# Allegro board ti_foc_motor.brd
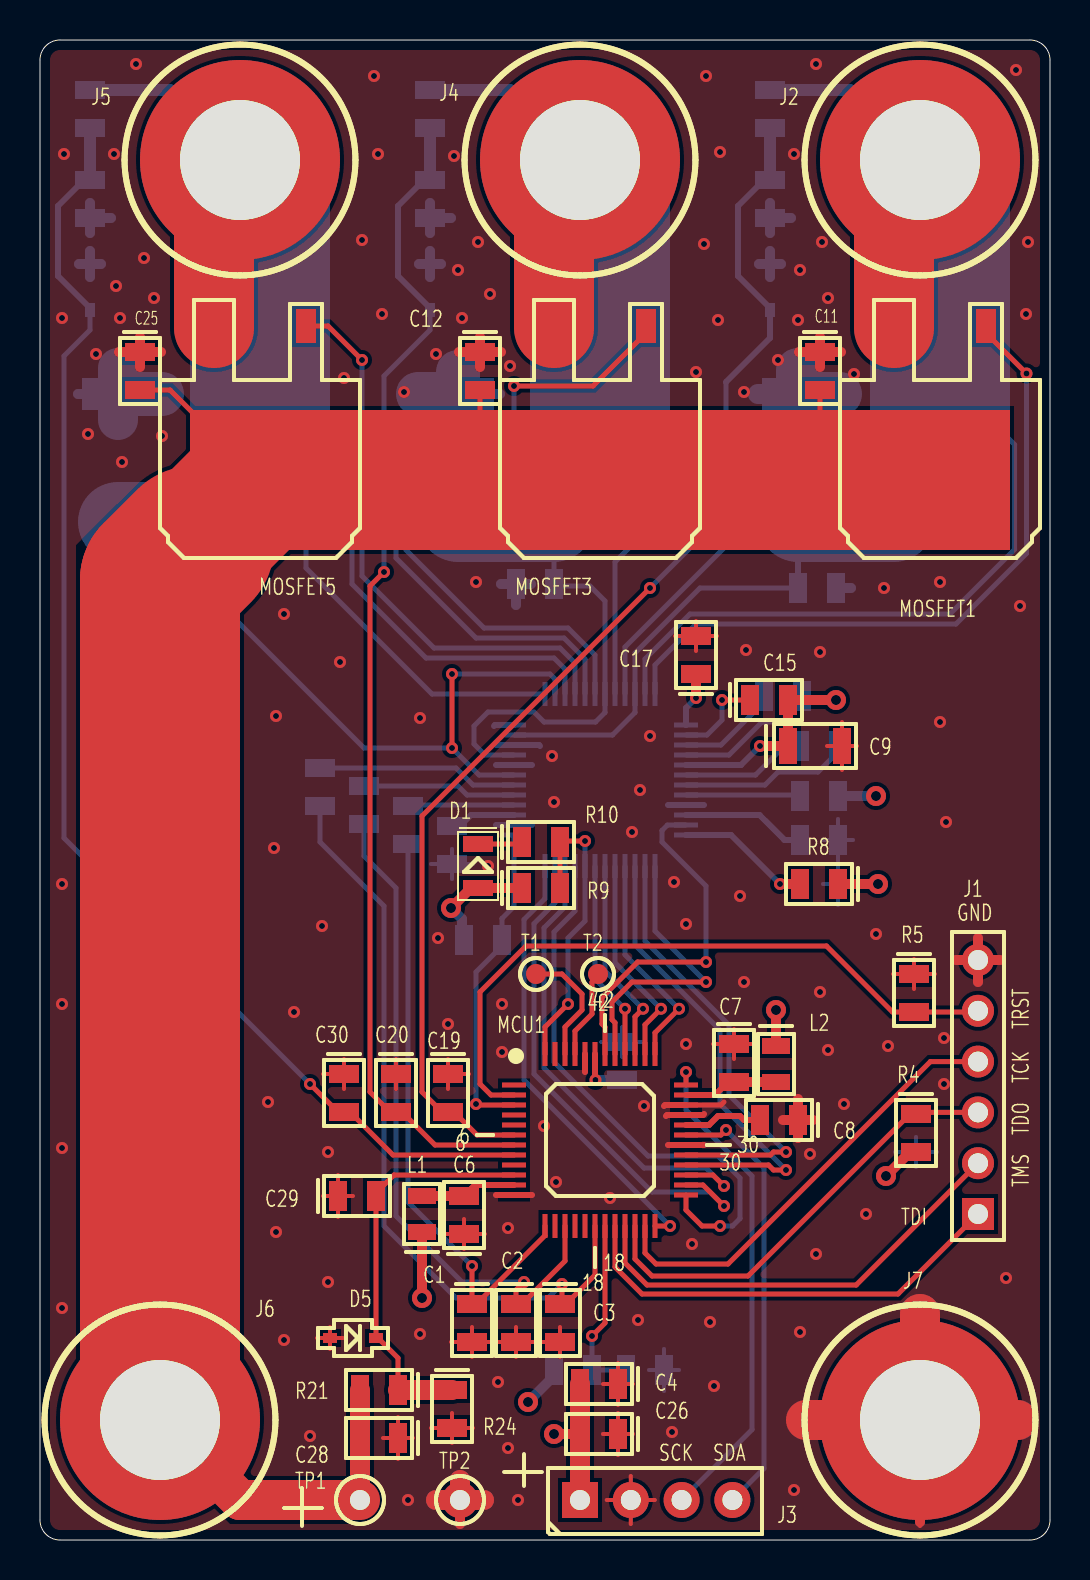
[diagram p0: board, top side]
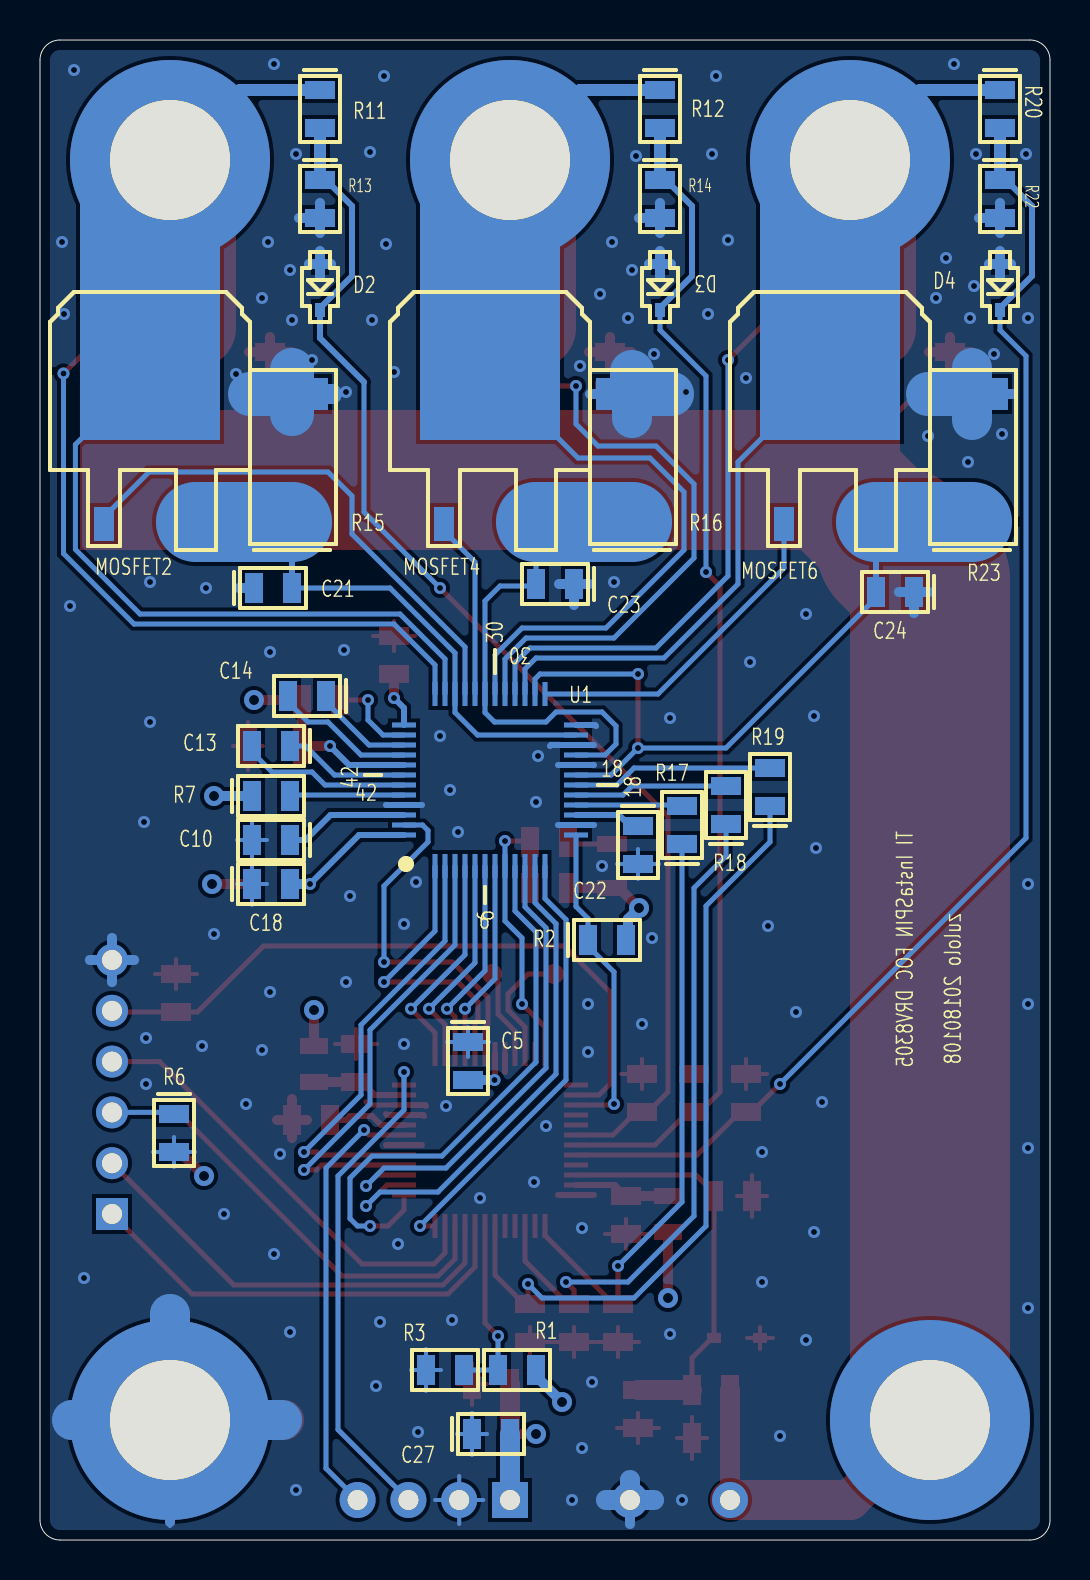
[diagram p1: board, bottom side, seen from below]

Outline 50.5 x 75 mm; copper layers: TOP, POWER, GND, BOTTOM. Coordinates in mm from the lower left corner of the outline.
Outline path: 0,74 0,1 arc(0.29,0.29) 1,0 49.5,0 arc(50.21,0.29) 50.5,1 50.5,74 arc(50.21,74.71) 49.5,75 1,75 arc(0.29,74.71) 0,74

## Placement (name value [footprint] x y rotation side)
C1  2.2nF  [SMD_C_0805]  21.6 11.8 0 top
C2  2.2nF  [SMD_C_0805]  23.8 11.8 0 top
C3  2.2nF  [SMD_C_0805]  26 11.8 0 top
C4  2.2uF  [SMD_C_0805]  28.9 7.8 270 top
C5  2.2uF  [SMD_C_0805]  29.1 24.9 180 bottom
C6  2.2uF  [SMD_C_0805]  21.2 15.3 180 top
C7  2.2uF  [SMD_C_0805]  34.7 24.8 0 top
C8  2.2uF  [SMD_C_0805]  37.9 21 270 top
C9  4.7uF  [SMD_C_1206]  37.4 39.7 90 top
C10  1uF  [SMD_C_0805]  38 35 270 bottom
C11  1uF  [SMD_C_0805]  39 59.4 0 top
C12  1uF  [SMD_C_0805]  22 59.4 0 top
C13  47nF  [SMD_C_0805]  38 39.7 270 bottom
C14  47nF  [SMD_C_0805]  36.2 42.2 270 bottom
C15  2.2uF  [SMD_C_0805]  35.5 42 90 top
C17  1uF  [SMD_C_0805]  32.8 43.3 180 top
C18  1uF  [SMD_C_0805]  39.9 32.8 90 bottom
C19  0.1uF  [SMD_C_0805]  20.4 23.3 0 top
C20  0.1uF  [SMD_C_0805]  17.8 23.3 0 top
C21  1nF  [SMD_C_0805]  39.8 47.6 90 bottom
C22  1uF  [SMD_C_0805]  20.6 35.7 180 bottom
C23  1nF  [SMD_C_0805]  23.8 47.8 270 bottom
C24  1nF  [SMD_C_0805]  6.8 47.4 270 bottom
C25  1uF  [SMD_C_0805]  5 59.4 0 top
C26  10uF  [SMD_C_0805]  28.9 5.3 270 top
C27  10uF  [SMD_C_0805]  28.9 5.3 90 bottom
C28  0.1uF  [SMD_C_0805]  17.9 5.1 270 top
C29  0.1uF  [SMD_C_0805]  14.9 17.2 90 top
C30  0.1uF  [SMD_C_0805]  15.2 23.3 0 top
D1  RED  [SMD_D_0805]  21.9 34.7 0 top
D2  3.3V  [SOD323]  36.5 61.5 0 bottom
D3  3.3V  [SOD323]  19.5 61.5 0 bottom
D4  3.3V  [SOD323]  2.5 61.5 0 bottom
D5  3.3V  [SOD323]  16.8 10.1 270 top
J1  JTAG  [CONNECTER1X6]  46.9 16.3 180 top
J2  motor_A  [BANANA]  44 69 0 top
J3  Conn1X4  [CONN1X4]  27 2 90 top
J4  motor_B  [BANANA]  27 69 0 top
J5  motor_C  [BANANA]  10 69 0 top
J6  power_P  [BANANA]  6 6 0 top
J7  power_GND  [BANANA]  44 6 0 top
L1  bead  [SMD_L_0805]  19.1 15.4 180 top
L2  bead  [SMD_L_0805]  36.8 24.7 0 top
MCU1  TMS320F28027  [LQFP48_MCU]  28 20 0 top
MOSFET1  IRLR7843-TO252AA  [TO252AA_ZK]  45 53 180 top
MOSFET2  IRLR7843-TO252AA  [TO252AA_ZK]  45 58.5 180 bottom
MOSFET3  IRLR7843-TO252AA  [TO252AA_ZK]  28 53 180 top
MOSFET4  IRLR7843-TO252AA  [TO252AA_ZK]  28 58.5 180 bottom
MOSFET5  IRLR7843-TO252AA  [TO252AA_ZK]  11 53 180 top
MOSFET6  IRLR7843-TO252AA  [TO252AA_ZK]  11 58.5 180 bottom
R1  820R  [SMD_R_0805]  27.6 8.5 90 bottom
R2  2.2K  [SMD_R_0805]  23.1 30 90 bottom
R3  2.2K  [SMD_R_0805]  29.3 8.5 270 bottom
R4  820R  [SMD_R_0805]  43.8 21.3 0 top
R5  2.2K  [SMD_R_0805]  43.7 28.3 0 top
R6  2.2K  [SMD_R_0805]  43.8 21.3 180 bottom
R7  100R  [SMD_R_0805]  39.9 37.2 90 bottom
R8  0R  [SMD_R_0805]  39.9 32.8 270 top
R9  10K  [SMD_R_0805]  24.1 32.6 90 top
R10  330R  [SMD_R_0805]  24.1 34.9 90 top
R11  62K  [SMD_R_0805]  36.5 72.5 180 bottom
R12  62K  [SMD_R_0805]  19.5 72.5 180 bottom
R13  5K  [SMD_R_0805]  36.5 68 180 bottom
R14  5K  [SMD_R_0805]  19.5 68 180 bottom
R15  0.007R  [SMD_R_2512]  37.9 50.9 0 bottom
R16  0.007R  [SMD_R_2512]  20.9 50.9 0 bottom
R17  56R  [SMD_R_0805]  18.4 34.8 0 bottom
R18  56R  [SMD_R_0805]  16.2 35.8 0 bottom
R19  56R  [SMD_R_0805]  14 36.7 0 bottom
R20  62K  [SMD_R_0805]  2.5 72.5 180 bottom
R21  62K  [SMD_R_0805]  17.9 7.5 270 top
R22  5K  [SMD_R_0805]  2.5 68 180 bottom
R23  0.007R  [SMD_R_2512]  3.9 50.9 0 bottom
R24  5K  [SMD_R_0805]  20.6 7.5 0 top
T1  X2  [TESTPAD_SMD_D10]  24.8 28.3 0 top
T2  X1  [TESTPAD_SMD_D10]  27.9 28.3 0 top
TP1  CAP_P  [TESTPAD_CIR_10]  16 2 0 top
TP2  CAP_N  [TESTPAD_CIR_10]  21 2 0 top
U1  DRV8305N  [HTQFP48]  28 38 90 bottom

## Library data of the parts
C1-C15 C17-C30 = CAP NP
D1 = LED
D2-D5 = DIODE TVS
J1 = C1X6Gen
J2 J4-J7 = Banana
J3 = C1X4Gen
L1 L2 = INDUCTOR
MCU1 = TMS320F28027PT
MOSFET1-MOSFET6 = N_MOSFET_TO252-263
R1-R24 = RESISTOR
T1 T2 = TestPad_Small_SMD
TP1 TP2 = TestPad
U1 = DRV8305_0

## Footprints (pads in the part's own frame, mm; a bottom-side part is the same pattern mirrored in y, then rotated)
BANANA
  round 10 hole 6: 1(0,0)
CONN1X4
  rect 1.8x1.8 hole 1: 1(0,0)
  round 1.8 hole 1: 2(0,-2.54) 3(0,-5.08) 4(0,-7.62)
CONNECTER1X6
  rect 1.6x1.6 hole 1: 1(0,0)
  round 1.6 hole 1: 2(0,-2.54) 3(0,-5.08) 4(0,-7.62) 5(0,-10.16) 6(0,-12.7)
HTQFP48
  rect 1.2x0.25 smd: 1(-4.3,2.75) 2(-4.3,2.25) 3(-4.3,1.75) 4(-4.3,1.25) 5(-4.3,0.75) 6(-4.3,0.25) 7(-4.3,-0.25) 8(-4.3,-0.75) 9(-4.3,-1.25) 10(-4.3,-1.75) 11(-4.3,-2.25) 12(-4.3,-2.75) 25(4.3,-2.75) 26(4.3,-2.25) 27(4.3,-1.75) 28(4.3,-1.25) 29(4.3,-0.75) 30(4.3,-0.25) 31(4.3,0.25) 32(4.3,0.75) 33(4.3,1.25) 34(4.3,1.75) 35(4.3,2.25) 36(4.3,2.75)
  rect 0.25x1.2 smd: 13(-2.75,-4.3) 14(-2.25,-4.3) 15(-1.75,-4.3) 16(-1.25,-4.3) 17(-0.75,-4.3) 18(-0.25,-4.3) 19(0.25,-4.3) 20(0.75,-4.3) 21(1.25,-4.3) 22(1.75,-4.3) 23(2.25,-4.3) 24(2.75,-4.3) 37(2.75,4.3) 38(2.25,4.3) 39(1.75,4.3) 40(1.25,4.3) 41(0.75,4.3) 42(0.25,4.3) 43(-0.25,4.3) 44(-0.75,4.3) 45(-1.25,4.3) 46(-1.75,4.3) 47(-2.25,4.3) 48(-2.75,4.3)
LQFP48_MCU
  rect 1.2x0.25 smd: 1(-4.3,2.75) 2(-4.3,2.25) 3(-4.3,1.75) 4(-4.3,1.25) 5(-4.3,0.75) 6(-4.3,0.25) 7(-4.3,-0.25) 8(-4.3,-0.75) 9(-4.3,-1.25) 10(-4.3,-1.75) 11(-4.3,-2.25) 12(-4.3,-2.75) 25(4.3,-2.75) 26(4.3,-2.25) 27(4.3,-1.75) 28(4.3,-1.25) 29(4.3,-0.75) 30(4.3,-0.25) 31(4.3,0.25) 32(4.3,0.75) 33(4.3,1.25) 34(4.3,1.75) 35(4.3,2.25) 36(4.3,2.75)
  rect 0.25x1.2 smd: 13(-2.75,-4.3) 14(-2.25,-4.3) 15(-1.75,-4.3) 16(-1.25,-4.3) 17(-0.75,-4.3) 18(-0.25,-4.3) 19(0.25,-4.3) 20(0.75,-4.3) 21(1.25,-4.3) 22(1.75,-4.3) 23(2.25,-4.3) 24(2.75,-4.3) 37(2.75,4.3) 38(2.25,4.3) 39(1.75,4.3) 40(1.25,4.3) 41(0.75,4.3) 42(0.25,4.3) 43(-0.25,4.3) 44(-0.75,4.3) 45(-1.25,4.3) 46(-1.75,4.3) 47(-2.25,4.3) 48(-2.75,4.3)
SMD_C_0805
  rect 1.5x0.9 smd: 1(0,0) 2(0,-1.9)
SMD_C_1206
  rect 1.8x0.9 smd: 1(0,0) 2(0,-2.7)
SMD_D_0805
  rect 1.5x0.8 smd: 1(0,0.1) 2(0,-2.1)
SMD_L_0805
  rect 1.4x0.8 smd: 1(0,0) 2(0,-1.8)
SMD_R_0805
  rect 1.5x0.9 smd: 1(0,0) 2(0,-1.9)
SMD_R_2512
  rect 3.6x1.6 smd: 1(0,0) 2(0,-6.4)
SOD323
  rect 0.5x0.7 smd: 1(0,0) 2(0,-2.3)
TESTPAD_CIR_10
  round 1.8 hole 1: 1(0,0)
TESTPAD_SMD_D10
  round 1 smd: 1(0,0)
TO252AA_ZK
  rect 1x1.7 smd: 1(-2.3,-7.7)
  rect 1.5x2.2 smd: 3(2.3,-7.6)
  rect 7x7 smd: 4(0,0)

## Nets
3.3V: C4.2 C26.2 C27.2 D1.2(ANODE) J3.1 L1.1 L2.1 R1.2 R2.2 R4.2 R8.1 R9.1
GND: C1.2 C2.2 C3.2 C4.1 C5.1 C6.1 C7.1 C8.1 C9.2 C10.2 C11.1 C12.1 C17.2 C18.1 C19.1 C20.1 C21.1 C22.2 C23.1 C24.1 C25.1 C26.1 C27.1 C28.1 C29.1 C30.1 D2.2(ANODE) D3.2(ANODE) D4.2(ANODE) D5.2(ANODE) J1.6 J3.2 J7.1 MCU1.12(VSSA/VREFLO) MCU1.30(TEST) MCU1.33(VSS#33) MCU1.34(V\R\E\G\E\N\Z\) MCU1.44(VSS#44) R3.2 R5.1 R6.2 R13.2 R14.2 R15.2 R16.2 R22.2 R23.2 R24.2 TP2.1(T) U1.14(GND#14) U1.20(SP3) U1.22(SP2) U1.24(SP1) U1.45(GND#45)
PVDD: C9.1 C11.2 C12.2 C15.2 C25.2 C28.2 J6.1 MOSFET1.4(D) MOSFET3.4(D) MOSFET5.4(D) R7.1 R21.2 TP1.1(T) U1.41(PVDD)
GH_A: MOSFET1.1(G) U1.36(GHA)
GH_B: MOSFET3.1(G) U1.29(GHB)
GH_C: MOSFET5.1(G) U1.28(GHC)
GL_A: MOSFET2.1(G) U1.33(GLA)
GL_B: MOSFET4.1(G) U1.32(GLB)
GL_C: MOSFET6.1(G) U1.25(GLC)
GPIO34: MCU1.19(GPIO34/COMP2OUT) R1.1 R3.1
MCU_EN_GATE: MCU1.41(GPIO6/EPWM4A/EPWMSYNCI/EPWMSYNC) U1.1(EN_GATE)
MCU_IIC_SCK: J3.3 MCU1.36(GPIO33/SCLA/EPWMSYNCO/A\D\C\S\O)
MCU_IIC_SDA: J3.4 MCU1.31(GPIO32/SDAA/EPWMSYNCI/A\D\C\S\O)
MCU_INH_A: MCU1.29(GPIO0/EPWM1A) U1.2(INHA)
MCU_INH_B: MCU1.37(GPIO2/EPWM2A) U1.4(INHB)
MCU_INH_C: MCU1.39(GPIO4/EPWM3A) U1.6(INHC)
MCU_INL_A: MCU1.28(GPIO1/EPWM1B/COMP1OUT) U1.3(INLA)
MCU_INL_B: MCU1.38(GPIO3/EPWM2B/COMP2OUT) U1.5(INLB)
MCU_INL_C: MCU1.40(GPIO5/EPWM3B/ECAP1) U1.7(INLC)
MCU_ISEN_A: C1.1 MCU1.13(ADCINB1) R17.1
MCU_ISEN_B: C2.1 MCU1.15(ADCINB3) R18.1
MCU_ISEN_C: C3.1 MCU1.18(ADCINB7) R19.1
MCU_NFAULT: MCU1.48(GPIO28/SCIRXDA/SDAA/T\Z\2\) R9.2 R10.2 U1.8(NFAULT)
MCU_PWRGD: MCU1.3(X\R\S\) R2.1 U1.13(PWRGD)
MCU_SPI_CS: MCU1.25(GPIO19/XCLKIN/S\P\I\S\T\E\A\/SC) U1.9(NSCS)
MCU_SPI_MISO: MCU1.26(GPIO17/SPISOMIA/T\Z\3\) U1.11(SDO)
MCU_SPI_MOSI: MCU1.27(GPIO16/SPISIMOA/T\Z\2\) U1.10(SDI)
MCU_SPI_SCK: MCU1.24(GPIO18/SPICLKA/SCITXDA/XCLKOUT) U1.12(SCLK)
MCU_VSEN_A: C19.2 D2.1(CATHODE) MCU1.6(ADCINA7) R11.2 R13.1
MCU_VSEN_B: C20.2 D3.1(CATHODE) MCU1.7(ADCINA3) R12.2 R14.1
MCU_VSEN_C: C30.2 D4.1(CATHODE) MCU1.8(ADCINA1) R20.2 R22.1
MCU_VSEN_PVDD: C29.2 D5.1(CATHODE) MCU1.10(ADCINA0/VREFHI) R21.1 R24.1
MCU_WAKE: MCU1.42(GPIO7/EPWM4B/SCIRXDA) U1.47(WAKE)
SH_A: J2.1 MOSFET1.3(S) MOSFET2.4(D) R11.1 U1.35(SHA)
SH_B: J4.1 MOSFET3.3(S) MOSFET4.4(D) R12.1 U1.30(SHB)
SH_C: J5.1 MOSFET5.3(S) MOSFET6.4(D) R20.1 U1.27(SHC)
SL_A: C21.2 MOSFET2.3(S) R15.1 U1.23(SN1) U1.34(SLA)
SL_B: C23.2 MOSFET4.3(S) R16.1 U1.21(SN2) U1.31(SLB)
SL_C: C24.2 MOSFET6.3(S) R23.1 U1.19(SN3) U1.26(SLC)
TCK: J1.4 MCU1.23(GPIO38/XCLKIN(TCK))
TDI: J1.1 MCU1.20(GPIO35(TDI))
TDO: J1.3 MCU1.22(GPIO37(TDO)) R4.1 R6.1
TMS: J1.2 MCU1.21(GPIO36(TMS))
TRST: J1.5 MCU1.2(T\R\S\T\) R5.2
N01800: D1.1(CATHODE) R10.1
N02208: C22.1 U1.15(AVDD)
N02325: R17.2 U1.16(SO1)
N02329: R18.2 U1.17(SO2)
N02333: R19.2 U1.18(SO3)
N03801: C17.1 U1.37(VCP_LSD)
N03912: C15.1 U1.38(VCPH)
N04769: C13.1 U1.42(CP1L)
N04773: C13.2 U1.43(CP1H)
N04796: C14.1 U1.39(CP2H)
N04800: C14.2 U1.40(CP2L)
N04838: R7.2 U1.44(VDRAIN)
N04994: C10.1 U1.46(DVDD)
N05122: C18.2 R8.2 U1.48(VREF)
N3758007: C6.2 L1.2 MCU1.11(VDDA)
N3759669: C7.2 L2.2 MCU1.35(VDDIO)
N3759821: C5.2 MCU1.43(VDD#43)
N3759959: C8.2 MCU1.32(VDD#32)
N3770874: MCU1.46(X2) T1.1
N3770878: MCU1.45(X1) T2.1

Pads without a net: MCU1 1 4 5 9 14 16 17 47

## Via types
v1: diameter 0.6, hole 0.3, TOP to BOTTOM, 144 vias
v2: diameter 1, hole 0.5, TOP to BOTTOM, 9 vias

## Routing (per net, layer and track width the routed paths; a pad name or vN(x,y) marks a point on that pad's centre or on a via; arc(x,y) is an arc through that point)
3.3V: length 31.1
  TOP w0.5: L1.1 v2(19.1,12.1) ; L2.1 v2(36.8,26.5) ; v2(20.55,31.6) 21.55,32.6 D1.2 R9.1 ; C26.2 v2(25.7,5.3) ; R4.2 43.5,19.4 v2(42.3,18.2) ; R8.1 v2(41.9,32.8)
  TOP w1: J3.1 C26.2 C4.2
  POWER w0.2: 26.8,2 J3.1
  POWER w0.5: 27,3.2 J3.1 27,0.8 ; 25.8,2 26.8,2
  BOTTOM w0.5: R1.2 25.7,8.2 v2(24.4,6.9) ; 20.5,31.6 v2(20.55,31.6) 21.1,31.05 21.1,30.1 R2.2
  BOTTOM w1: J3.1 C26.2
GND: length 260
  TOP w0.2: C9.2 40.1,40.9 ; C9.2 40.1,38.5 ; C9.2 39.35,39.7 ; C9.2 40.85,39.7 ; C17.2 32.8,45.95 ; C17.2 32.8,44.45 ; C17.2 33.85,45.2 ; C17.2 31.75,45.2 ; J3.2 29.54,3.2 ; J3.2 30.74,2 ; J3.2 28.34,2 ; J3.2 29.54,0.8 ; 15.2,22.55 C30.1 ; C30.1 15.2,24.05 ; C30.1 14.15,23.3 ; R24.2 21.65,5.6 ; R24.2 20.6,4.85 ; R24.2 19.55,5.6 ; R24.2 20.6,6.35 ; 20.15,15.3 C6.1 ; C6.1 21.2,14.55 ; C6.1 21.2,16.05 ; C6.1 22.25,15.3 ; 43.7,27.55 R5.1 ; R5.1 43.7,29.05 ; R5.1 42.65,28.3 ; R5.1 44.75,28.3 ; 17.15,5.1 C28.1 ; C28.1 18.65,5.1 ; C28.1 17.9,6.15 ; C28.1 17.9,4.05 ; 20.55,9.9 C1.2 ; C1.2 21.6,10.65 ; C1.2 22.65,9.9 ; C1.2 21.6,9.15 ; C2.2 23.8,10.65 ; C2.2 23.8,9.15 ; C2.2 22.75,9.9 ; C2.2 24.85,9.9 ; 44,0.7 44,0.9 ; 17.8,22.55 C20.1 17.8,24.05 ; 26,9.15 C3.2 ; C3.2 26,10.65 ; C3.2 24.95,9.9 ; 28.9,4.25 C26.1 ; C26.1 29.65,5.3 ; C26.1 28.15,5.3 ; C26.1 28.9,6.35 ; 14.5,9.55 D5.2 ; D5.2 14.5,10.65 ; D5.2 15.15,10.1 ; D5.2 13.85,10.1 ; 34.7,24.05 C7.1 ; C7.1 34.7,25.55 ; C7.1 33.65,24.8 ; C7.1 35.75,24.8 ; 14.9,16.15 C29.1 ; C29.1 15.65,17.2 ; C29.1 14.9,18.25 ; C29.1 14.15,17.2 ; 49.3,6 48.87,6 ; C19.1 20.4,24.05 ; C19.1 20.4,22.55 ; C19.1 21.45,23.3 ; 28.15,7.8 C4.1 ; C4.1 28.9,6.75 ; C4.1 28.9,8.85 ; C4.1 29.65,7.8 ; 37.9,19.95 37.9,20.1 ; 21,3.2 21,3
  TOP w0.25: MCU1.34 34.05,21.75 34.2,21.9
  TOP w0.3: 31.2,21.7 31.25,21.75 MCU1.34 ; 24.6,17.25 MCU1.12 22.8,17.25 ; MCU1.44 27.25,23.4 ; 31.4,19.75 MCU1.30 33.2,19.75 ; 31.3,21.2 31.35,21.25 MCU1.33 33.15,21.25 33.2,21.3
  TOP w0.5: C12.1 22,58.65 ; C12.1 23.05,59.4 ; C12.1 22,60.15 ; C12.1 20.95,59.4 ; J1.6 46.9,30.1 ; J1.6 46.9,27.9 ; J1.6 48,29 ; J1.6 45.8,29 ; C25.1 6.05,59.4 ; C25.1 5,60.15 ; C25.1 3.95,59.4 ; C25.1 5,58.65 ; 37.9,20.1 C8.1 ; C8.1 37.15,21 ; C8.1 38.65,21 ; C8.1 37.9,22.05 ; C11.1 39,60.15 ; C11.1 37.95,59.4 ; C11.1 39,58.65 ; C11.1 40.05,59.4 ; TP2.1 21,0.8 ; 44,0.9 J7.1
  TOP w1: 21,3 TP2.1 ; TP2.1 22.2,2 ; TP2.1 19.8,2
  TOP w2: J7.1 44,11.3 ; J7.1 38.3,6 ; J7.1 48.87,6
  GND w0.2: 49.1,6 49.3,6 ; 44,0.8 44,0.7 ; 46.9,28 46.9,27.9 ; 21,3.1 21,3.2 ; 47.9,29 48,29 ; 19.9,2 19.8,2 ; 21,0.9 21,0.8 ; 30.6,2 30.74,2 ; 44,11.1 44,11.3 ; 45.9,29 45.8,29 ; 29.54,0.9 29.54,0.8 ; 28.34,2 28.35,2
  GND w0.5: J3.2 29.54,3.2 ; J3.2 29.54,0.9 ; J3.2 28.35,2 ; J3.2 30.6,2 ; J1.6 46.9,30.1 ; J1.6 45.9,29 ; J1.6 47.9,29 ; J1.6 46.9,28 ; TP2.1 21,0.9 ; J7.1 44,0.8
  GND w1: TP2.1 22.2,2 ; TP2.1 19.9,2 ; TP2.1 21,3.1
  GND w1.5: J7.1 49.1,6
  GND w2: 38.5,6 J7.1 44,11.1
  BOTTOM w0.2: 28.34,2 J3.2 ; J3.2 29.54,3.2 ; J3.2 29.54,0.8 ; J3.2 30.74,2 ; 28.9,4.25 C26.1 ; C26.1 29.65,5.3 ; C26.1 28.9,6.35 ; C26.1 28.15,5.3 ; 21,3.2 21,3 ; 30.45,8.5 R3.2 ; R3.2 31.2,7.45 ; R3.2 31.2,9.55 ; R3.2 31.95,8.5 ; 35.8,57.3 35.9,57.3 ; C5.1 30.15,24.9 ; C5.1 29.1,24.15 ; C5.1 28.05,24.9 ; C5.1 29.1,25.65 ; 18.8,57.3 18.9,57.3 ; 39.15,35 C10.2 ; C10.2 39.9,36.05 ; C10.2 39.9,33.95 ; C10.2 40.65,35 ; C18.1 39.9,33.85 ; C18.1 40.65,32.8 ; C18.1 39.9,31.75 ; C18.1 39.15,32.8 ; 43.8,18.65 R6.2 ; R6.2 43.8,20.15 ; R6.2 44.85,19.4 ; R6.2 42.75,19.4 ; 20.6,33.05 C22.2 ; C22.2 20.6,34.55 ; C22.2 19.55,33.8 ; C22.2 21.65,33.8 ; 37.9,56.2 37.9,56.3 ; 1.8,57.3 1.9,57.3 ; 49.3,6 48.9,6 ; 44,0.7 44,0.9
  BOTTOM w0.3: 22.7,40.7 22.75,40.75 U1.24 ; 33.2,36.75 U1.45 31.4,36.75 ; 22.8,38.75 U1.20 24.6,38.75 ; 22.8,39.75 U1.22 24.95,39.75 25,39.7 ; 22.8,35.75 U1.14 24.6,35.75
  BOTTOM w0.5: D2.2 37.05,63.8 ; D2.2 36.5,64.45 ; D2.2 36.5,63.15 ; D2.2 35.95,63.8 ; C23.1 23.05,47.8 ; C23.1 24.55,47.8 ; C23.1 23.8,46.75 ; J1.6 46.9,30.1 ; J1.6 48,29 ; J1.6 46.9,27.9 ; J1.6 45.8,29 ; D4.2 1.95,63.8 ; D4.2 2.5,64.45 ; D4.2 2.5,63.15 ; D4.2 3.05,63.8 ; R22.2 2.5,66.85 ; R22.2 2.5,65.35 ; R22.2 3.55,66.1 ; D3.2 18.95,63.8 ; D3.2 20.05,63.8 ; D3.2 19.5,63.15 ; D3.2 19.5,64.45 ; R13.2 36.5,65.35 ; R13.2 36.5,66.85 ; R13.2 37.55,66.1 ; R14.2 20.55,66.1 ; R14.2 19.5,65.35 ; R14.2 19.5,66.85 ; C21.1 40.55,47.6 ; C24.1 6.05,47.4 ; C24.1 6.8,46.35 ; C24.1 7.55,47.4 ; 44,0.9 J7.1 ; 1.9,57.3 R23.2 ; R16.2 23,57.3 ; TP2.1 21,0.8
  BOTTOM w1: TP2.1 19.8,2 ; TP2.1 22.2,2 ; TP2.1 21,3 ; 35.9,57.3 R15.2
  BOTTOM w2: 3.9,58.6 R23.2 3.9,56 ; 38.4,6 J7.1 ; J7.1 44,11.3 ; J7.1 48.9,6 ; R16.2 20.9,56.1
  BOTTOM w2.2: R23.2 6.1,57.3 ; 37.9,56.3 R15.2 ; R15.2 37.9,58.5 ; R15.2 40,57.3 ; 20.9,58.4 R16.2 18.9,57.3
  vias: v1(1.1,61.1) v1(1.1,32.8) v1(1.1,26.8) v1(1.1,19.6) v1(1.1,11.6) v1(1.2,69.3) v1(2.4,55.3) v1(2.8,59.3) v1(3.7,69.3) v1(3.8,62.7) v1(4,61.1) v1(4.1,53.9) v1(4.8,73.8) v1(5.2,64.1) v1(5.7,62.1) v1(6.1,55.2) v1(11.4,21.9) v1(11.7,34.6) v1(11.8,41.2) v1(11.8,15.4) v1(12.2,46.3) v1(12.2,10) v1(12.7,26.4) v1(13.5,5.2) v1(14.1,30.7) v1(14.4,19.4) v1(14.4,12.9) v1(15,43.9) v1(15.2,58.1) v1(16.1,65) v1(16.7,73.2) v1(16.9,69.3) v1(17.1,61.3) v1(18.2,57.4) v1(18.4,2) v1(19,41.1) v1(19,10.3) v1(19.8,59.3) v1(19.9,30.1) v1(20.4,25.8) v1(20.7,69.2) v1(20.9,63.5) v1(21.1,61.1) v1(21.8,47.9) v1(21.9,64.9) v1(22.4,33.7) v1(22.5,62.3) v1(22.9,7.9) v1(23.1,26.8) v1(23.1,24.4) v1(23.4,15.6) v1(23.4,4.6) v1(23.5,58.7) v1(23.9,2) v1(25.2,20.7) v1(25.6,39.2) v1(25.7,36.9) v1(25.8,17.9) v1(28.5,17.1) v1(29.6,35.4) v1(29.9,11) v1(30,37.5) v1(30.2,21.7) v1(30.5,40.2) v1(31.6,5.4) v1(31.7,32.9) v1(32.3,30.8) v1(32.3,24.8) v1(32.6,14.8) v1(32.8,58.4) v1(33.2,64.8) v1(33.3,73.2) v1(33.5,10.9) v1(33.7,7.7) v1(33.9,61) v1(34,69.4) v1(35,32.2) v1(35.2,57.4) v1(35.2,27.9) v1(35.3,44.5) v1(36.9,59) v1(37.7,69.3) v1(37.7,2.5) v1(37.9,61) v1(38,63.5) v1(38,10.4) v1(38.5,19.3) v1(38.8,73.8) v1(38.8,14.3) v1(39,44.4) v1(39,27.4) v1(39.1,64.9) v1(39.4,62.1) v1(39.4,24.5) v1(40.2,21.8) v1(40.7,58.3) v1(41.3,16.3) v1(41.8,30.3) v1(42.2,47.6) v1(42.4,24.7) v1(45,47.9) v1(45,40.9) v1(45.2,25.1) v1(45.2,22.8) v1(45.3,35.9) v1(48.3,13.1) v1(48.8,73.5) v1(49,46.7) v1(49.3,61.3) v1(49.4,64.9)
PVDD: length 144.4
  TOP w0.25: C11.2 39,55.17 41.17,53 ; C25.2 6.5,57.5 MOSFET5.4 ; C12.2 22,53
  TOP w0.5: v1(36,39.7) C9.1 C15.2 v2(39.8,42)
  TOP w1: R21.2 C28.2 TP1.1
  TOP w2: J6.1 10,2 TP1.1
  TOP w7: 7.7,49.7 MOSFET5.4 MOSFET3.4 MOSFET1.4
  TOP w8: J6.1 6,48 7.7,49.7
  POWER w0.2: 11.1,6 11.3,6
  POWER w0.5: TP1.1 16,3.2 ; TP1.1 14.7,2 ; TP1.1 17.2,2
  POWER w2: 6,11.3 J6.1 11.1,6
  BOTTOM w0.3: U1.41 35.05,38.75 v1(36,39.7)
  BOTTOM w0.5: R7.1 v2(41.8,37.2)
GH_A: length 34.5
  TOP w0.25: MOSFET1.1 47.3,60.35 v1(49.33,58.33)
  BOTTOM w0.25: v1(49.33,58.33) 49.33,49.33 45.8,45.8 32.8,45.8 30.75,43.75 U1.36
GH_B: length 34.1
  TOP w0.25: v1(23.7,57.7) 27.65,57.7 30.3,60.35 MOSFET3.1
  BOTTOM w0.25: v1(23.7,57.7) 23.7,55.8 22.6,54.7 19.7,54.7 17.8,52.8 17.8,49.1 21.8,45.1 26.2,45.1 27.25,44.05 U1.29
GH_C: length 28.3
  TOP w0.25: v1(16.1,59) 14.4,60.7 MOSFET5.1
  BOTTOM w0.25: U1.28 26.75,43.85 26,44.6 19.7,44.6 16.1,48.2 v1(16.1,59)
GL_A: length 26.4
  BOTTOM w0.25: MOSFET2.1 47.3,51.15 45.05,53.4 36.1,53.4 34.9,52.2 34.9,50.3 29.25,44.65 U1.33
GL_B: length 9.1
  BOTTOM w0.25: MOSFET4.1 30.3,50.45 28.75,48.9 U1.32
GL_C: length 16.8
  BOTTOM w0.25: U1.25 19.6,42.3 13.3,48.6 MOSFET6.1
GPIO34: length 9.2
  TOP w0.25: MCU1.19 28.25,10.85 v1(27.6,10.2)
  BOTTOM w0.25: R3.1 R1.1 v1(27.6,10.2)
MCU_EN_GATE: length 14.6
  TOP w0.25: MCU1.41 28.75,25.87 28.6,26.02 28.6,26.9 29.6,27.9 v1(33.3,27.9)
  BOTTOM w0.25: v1(33.3,27.9) 30.75,30.45 U1.1
MCU_IIC_SCK: length 24.9
  TOP w0.25: MCU1.36 v1(32.3,23.4)
  BOTTOM w0.25: v1(32.3,23.4) 32.3,21.5 35.6,18.2 35.6,5.52 J3.3
MCU_IIC_SDA: length 22
  TOP w0.25: MCU1.31 34.05,20.25 v1(34.3,20.5)
  BOTTOM w0.25: v1(34.3,20.5) 36.2,18.6 36.2,3.58 J3.4
MCU_INH_A: length 22.3
  TOP w0.25: v1(37.3,19.4) 36.67,19.4 36.52,19.25 MCU1.29
  BOTTOM w0.25: v1(37.3,19.4) 34.45,22.25 34.45,25.75 30.25,29.95 U1.2
MCU_INH_B: length 11
  TOP w0.25: v1(31.95,26.56) 30.75,25.36 MCU1.37
  BOTTOM w0.25: U1.4 29.25,29.26 v1(31.95,26.56)
MCU_INH_C: length 10.4
  TOP w0.25: MCU1.39 29.75,26.16 v1(30.15,26.56)
  BOTTOM w0.25: U1.6 28.25,28.46 v1(30.15,26.56)
MCU_INL_A: length 23.4
  TOP w0.25: MCU1.28 36.42,18.75 36.67,18.5 v1(37.3,18.5)
  BOTTOM w0.25: v1(37.3,18.5) 34,21.8 34,25.5 29.75,29.75 U1.3
MCU_INL_B: length 10.7
  TOP w0.25: v1(31.05,26.56) 30.25,25.76 MCU1.38
  BOTTOM w0.25: v1(31.05,26.56) 28.75,28.86 U1.5
MCU_INL_C: length 10
  TOP w0.25: v1(29.25,26.56) MCU1.40
  BOTTOM w0.25: U1.7 27.75,28.06 v1(29.25,26.56)
MCU_ISEN_A: length 29.9
  TOP w0.25: MCU1.13 25.25,15.22 21.82,11.8 C1.1 v1(21.6,13.7)
  BOTTOM w0.25: v1(21.6,13.7) 18.4,16.9 R17.1
MCU_ISEN_B: length 34.4
  TOP w0.25: v1(24.2,12.9) 23.8,12.5 C2.1 24.1,11.8 26.25,13.95 MCU1.15
  BOTTOM w0.25: R18.1 16.2,34.2 17.8,32.6 17.8,16.2 21.1,12.9 v1(24.2,12.9)
MCU_ISEN_C: length 38.8
  TOP w0.25: MCU1.18 27.75,13.25 26.3,11.8 C3.1 26.1,11.9 v1(26.1,12.8)
  BOTTOM w0.25: R19.1 14,34.9 17.2,31.7 17.2,15.7 20.8,12.1 25.4,12.1 v1(26.1,12.8)
MCU_NFAULT: length 15
  TOP w0.25: v1(27.25,34.95) 26.05,34.95 R10.2 R9.2 ; MCU1.48 25.25,25.65 v1(26.4,26.8)
  BOTTOM w0.25: v1(26.4,26.8) 26.4,30.1 27.25,30.95 U1.8 v1(27.25,34.95)
MCU_PWRGD: length 16.2
  TOP w0.25: v1(21.8,21.8) 21.85,21.75 MCU1.3
  BOTTOM w0.25: U1.13 23.7,31.68 23.1,31.07 R2.1 23.1,29.7 21.8,28.4 v1(21.8,21.8)
MCU_SPI_CS: length 27.9
  TOP w0.25: v1(34,15.7) 33.1,15.7 32.3,16.5 MCU1.25
  BOTTOM w0.25: v1(34,15.7) 34.62,15.7 35,16.07 35,18.1 33.9,19.2 30.4,19.2 25.7,23.9 25.7,30.4 26.75,31.45 U1.9
MCU_SPI_MISO: length 25.4
  TOP w0.25: MCU1.26 33.15,17.75 v1(34.2,16.7)
  BOTTOM w0.25: U1.11 25.75,31.86 24.7,30.81 24.7,23.3 30.6,17.4 33.5,17.4 v1(34.2,16.7)
MCU_SPI_MOSI: length 24.1
  TOP w0.25: MCU1.27 33.65,18.25 v1(34.2,17.7)
  BOTTOM w0.25: U1.10 26.25,31.66 25.2,30.61 25.2,23.6 30.2,18.6 33.3,18.6 v1(34.2,17.7)
MCU_SPI_SCK: length 22.2
  TOP w0.25: v1(31.5,15.7) MCU1.24
  BOTTOM w0.25: v1(31.5,15.7) 24.2,23 24.2,31.02 25.25,32.07 U1.12
MCU_VSEN_A: length 62.4
  TOP w0.25: v1(30.5,47.6) 19.1,36.2 19.1,22.4 20.1,21.4 C19.2 20.7,21.4 21.85,20.25 MCU1.6
  BOTTOM w0.25: v1(30.5,47.6) 34.3,51.4 34.3,57.9
  BOTTOM w0.3: R13.1 36.2,68 34.9,66.7 34.9,63.2 36.5,61.6 D2.1 36.5,60.1 34.3,57.9
  BOTTOM w0.6: R11.2 R13.1
MCU_VSEN_B: length 59.2
  TOP w0.25: v1(17.2,48.4) 16.5,47.7 16.5,22.4 17.5,21.4 C20.2 18.1,21.4 19.75,19.75 MCU1.7
  BOTTOM w0.25: D3.1 19.5,60.5 17.2,58.2 v1(17.2,48.4)
  BOTTOM w0.3: D3.1 19.5,61.6 17.9,63.2 17.9,66.7 19.2,68 R14.1
  BOTTOM w0.6: R12.2 R14.1
MCU_VSEN_C: length 66.6
  TOP w0.25: v1(13.5,22.8) 14.9,21.4 C30.2 15.5,21.4 17.65,19.25 MCU1.8
  BOTTOM w0.25: v1(13.5,22.8) 1.2,35.1 1.2,59.2 2.5,60.5 D4.1
  BOTTOM w0.3: D4.1 2.5,61.6 0.9,63.2 0.9,66.7 2.2,68 R22.1
  BOTTOM w0.6: R20.2 R22.1
MCU_VSEN_PVDD: length 20.3
  TOP w0.25: R21.1 17.9,9.1 16.9,10.1 D5.1 C29.2 16.8,17.35 17.7,18.25 MCU1.10
  TOP w1: R21.1 R24.1
MCU_WAKE: length 17.6
  TOP w0.25: MCU1.42 28.25,25.65 28.1,25.8 28.1,27.12 29.88,28.9 v1(33.3,28.9)
  BOTTOM w0.25: v1(33.3,28.9) 33.3,32.7 31.1,34.9 31.1,35.48 31.38,35.75 U1.47
SH_A: length 61.8
  TOP w4: MOSFET1.3 42.7,67.7 J2.1
  BOTTOM w0.25: U1.35 30.25,44.05 32.5,46.3 45.5,46.3 48.73,49.53 48.73,54.77 MOSFET2.4
  BOTTOM w0.6: J2.1 40.5,72.5 R11.1
  BOTTOM w7: MOSFET2.4 45,68 J2.1
SH_B: length 57.5
  TOP w4: J4.1 25.7,67.7 MOSFET3.3
  BOTTOM w0.25: MOSFET4.4 23.6,54.1 20,54.1 18.3,52.4 18.3,49.5 22.2,45.6 26.4,45.6 27.75,44.25 U1.30
  BOTTOM w0.6: J4.1 23.5,72.5 R12.1
  BOTTOM w7: J4.1 28,68 MOSFET4.4
SH_C: length 55.1
  TOP w4: J5.1 8.7,67.7 MOSFET5.3
  BOTTOM w0.25: U1.27 26.25,43.55 25.7,44.1 19.3,44.1 15.6,47.8 15.6,53.9 MOSFET6.4
  BOTTOM w0.6: R20.1 6.5,72.5 J5.1
  BOTTOM w7: MOSFET6.4 11,68 J5.1
SL_A: length 27.1
  BOTTOM w0.25: C21.2 33,47.6 29.75,44.35 U1.34 29.75,41.38 28.62,40.25 U1.23
  BOTTOM w0.3: C21.2 R15.1
  BOTTOM w4: MOSFET2.3 R15.1
SL_B: length 26.8
  BOTTOM w0.25: U1.21 22.25,39.25 21.7,39.8 21.7,40.7 22.4,41.4 24.7,41.4 25.2,40.9 27.77,40.9 28.25,41.38 U1.31 28.25,46.95 27.5,47.7 25.7,47.7 C23.2 MOSFET4.3
  BOTTOM w4: MOSFET4.3 R16.1
SL_C: length 37
  TOP w0.25: v1(20.6,43.3) v1(20.6,39.6)
  BOTTOM w0.25: U1.19 21.95,38.25 v1(20.6,39.6) 16.2,39.6 8.7,47.1 C24.2 ; v1(20.6,43.3) 25.5,43.3 25.75,43.05 U1.26
  BOTTOM w0.3: C24.2 MOSFET6.3
  BOTTOM w4: MOSFET6.3 R23.1
TCK: length 22.4
  TOP w0.25: J1.4 44.52,23.92 34.4,13.8 30.8,13.8 30.25,14.35 MCU1.23
TDI: length 22.4
  TOP w0.25: MCU1.20 28.75,13.65 30.1,12.3 42.9,12.3 J1.1
TDO: length 25.7
  TOP w0.25: MCU1.22 29.75,14.05 30.6,13.2 35.4,13.2 43.5,21.3 R4.1 43.88,21.38 J1.3
  BOTTOM w0.25: R4.1 43.88,21.38 J1.3
TMS: length 22.5
  TOP w0.25: MCU1.21 29.25,13.85 30.35,12.75 40.81,12.75 J1.2
TRST: length 33.8
  TOP w0.25: J1.5 46.84,26.4 R5.2 42.62,26.4 39.33,29.7 24.3,29.7 22,27.4 22,22.8 22.55,22.25 MCU1.2
N01800: length 2.2
  TOP w0.25: R10.1 24,34.8 D1.1
N02208: length 3.3
  BOTTOM w0.3: U1.15 21.55,36.25 21,35.7 C22.1
N02325: length 5.3
  BOTTOM w0.25: R17.2 18.45,36.75 U1.16
N02329: length 7.7
  BOTTOM w0.25: U1.17 21.35,37.25 20.9,37.7 R18.2
N02333: length 10.1
  BOTTOM w0.25: U1.18 21.65,37.75 20.8,38.6 R19.2
N03801: length 2.8
  TOP w0.5: v1(32.8,42.1) C17.1
  BOTTOM w0.3: v1(32.8,42.1) 32.3,41.6 U1.37
N03912: length 4.5
  TOP w0.25: v1(34.1,42) C15.1
  BOTTOM w0.25: U1.38 33.35,40.25 34.1,41 v1(34.1,42)
N04769: length 6.3
  BOTTOM w0.25: C13.1 37.23,39.7 35.77,38.25 U1.42
N04773: length 8.6
  BOTTOM w0.25: U1.43 36.25,37.75 36.9,38.4 38.9,38.4 39.9,39.4 C13.2
N04796: length 5.1
  BOTTOM w0.25: U1.39 34.05,39.75 36.2,41.9 C14.1
N04800: length 7.2
  BOTTOM w0.25: U1.40 34.45,39.25 36.1,40.9 37.1,40.9 38.1,41.9 C14.2
N04838: length 5.7
  BOTTOM w0.25: U1.44 37.95,37.25 R7.2
N04994: length 6.2
  BOTTOM w0.3: C10.1 37.23,35 35.98,36.25 U1.46
N05122: length 7.7
  TOP w0.5: v1(37,32.8) R8.2
  BOTTOM w0.3: v1(37,32.8) 34.55,35.25 U1.48
  BOTTOM w0.5: v1(37,32.8) R8.2
N3758007: length 4.8
  TOP w0.3: MCU1.11 21.75,17.75 C6.2
  TOP w0.5: L1.2 C6.2
N3759669: length 4.8
  TOP w0.3: C7.2 34.4,22.9 33.75,22.25 MCU1.35
  TOP w0.5: C7.2 L2.2
N3759821: length 2.6
  TOP w0.3: v1(27.77,23) 27.77,23.03 27.75,23.05 MCU1.43
  BOTTOM w0.5: C5.2 v1(27.77,23)
N3759959: length 4
  TOP w0.3: C8.2 35.2,21 35,21.2 33.9,21.2 33.45,20.75 MCU1.32
N3770874: length 6.1
  TOP w0.25: MCU1.46 26.25,25.65 27.1,26.5 27.1,27.3 26.1,28.3 T1.1
N3770878: length 4.5
  TOP w0.25: MCU1.45 26.75,25.45 27.6,26.3 27.6,27.9 27.9,28.2 T2.1

## Copper pours and planes (outline as drawn; the poured copper is in the pictures)
3.3V on POWER: 25.4,0.5 23.6,2.3 23.6,4.9 17.5,11 17.5,31.9 20.1,34.5 42,34.5 42.7,33.8 42.7,31.7 39.3,28.3 39.3,22.9 40.3,21.9 41.7,21.9 43.8,19.8 43.8,18.2 43.1,17.5 39.7,17.5 34.4,22.8 34.4,29.6 34.1,29.9 25.9,29.9 23.3,27.3 23.3,12.7 28.9,7.1 28.9,3.8 28.3,3.2 28.3,1 27.8,0.5
GND on TOP: 1,0.5 0.65,0.65 0.5,1 0.5,74 0.65,74.35 1,74.5 49.5,74.5 49.85,74.35 50,74 50,1 49.85,0.65 49.5,0.5 ; 12 cut-outs
GND on BOTTOM: 1,0.5 0.65,0.65 0.5,1 0.5,74 0.65,74.35 1,74.5 49.5,74.5 49.85,74.35 50,74 50,1 49.85,0.65 49.5,0.5 ; 14 cut-outs
GND on GND: 1,0.5 0.65,0.65 0.5,1 0.5,74 0.65,74.35 1,74.5 49.5,74.5 49.85,74.35 50,74 50,1 49.85,0.65 49.5,0.5
PVDD on POWER: 0.7,0.7 0.7,53.9 4.2,57.4 48.1,57.4 49.8,55.7 49.8,39.4 46.3,35.9 19,35.9 15.9,32.8 15.9,10.3 18.8,7.4 18.8,2.6 16.9,0.7 ; 1 cut-out

## Text on the board
Ref Des/Silkscreen Bottom: zulolo 20180108 | TI InstaSPIN FOC DRV8305
Ref Des/Silkscreen Top: SCK | SDA | TDI | GND | TRST | TCK | TDO | TMS
PLACE_BOUND_TOP: FIGURE | SIZE | 0.3 | 0.5 | 1.0 | 6.0 | DRILL CHART: TOP to BOTTOM | ALL UNITS ARE IN MILLIMETERS | PLATED | QTY | 144 | 9 | 12 | 5
